# Altium PCB ball_dropper_rev2.PcbDoc (part 2 of 2)
Units mil, origin at the board's own origin, x right, y up, seen from the top; angles counter-clockwise.
Board outline 6000 x 4000 mil, 2 copper layers (Top Layer, Bottom Layer); 94 components, 89 nets, 479 pads, 374 vias.
Unrouted connection lines stored in the file: 4.
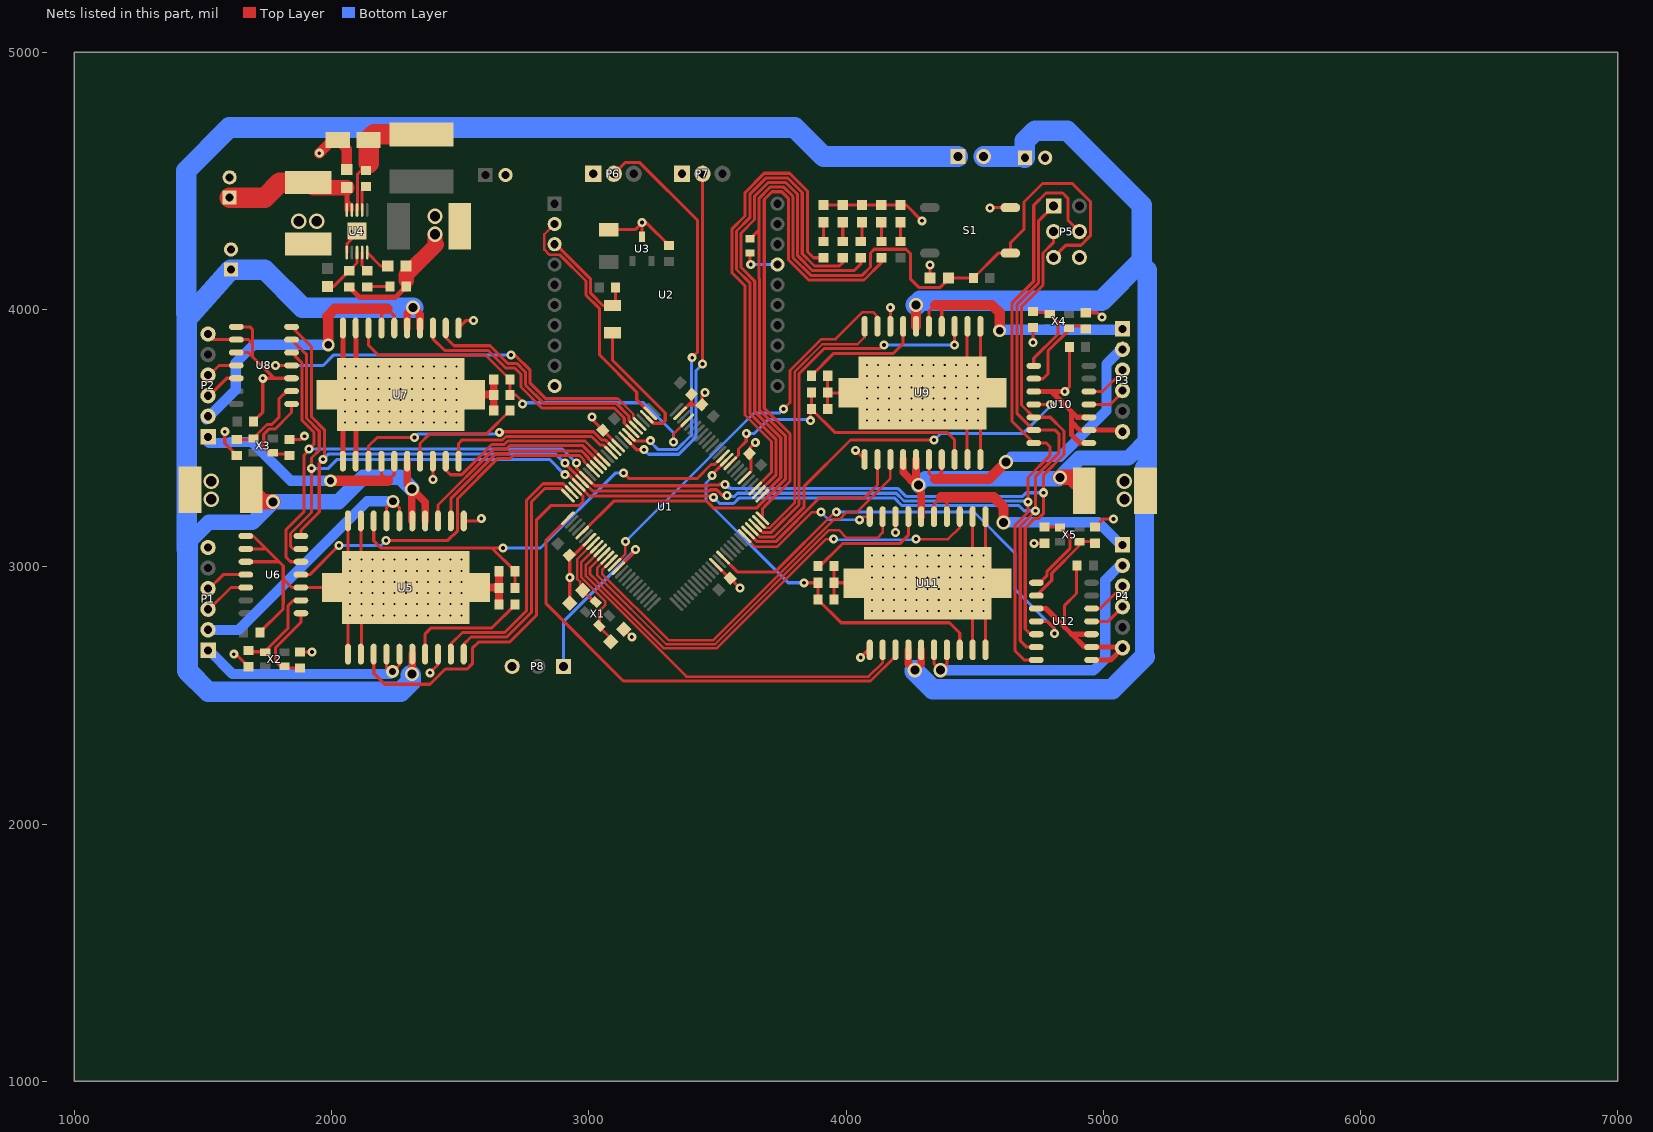
[diagram p2: the nets of this part, all layers, seen from the top]

## Via types
v1: diameter 19.68, hole 7.87, Top Layer to Bottom Layer, 266 vias
v2: diameter 35, hole 15, Top Layer to Bottom Layer, 70 vias
v3: diameter 55, hole 35, Top Layer to Bottom Layer, 13 vias
v4: diameter 60, hole 40, Top Layer to Bottom Layer, 8 vias
v5: diameter 35, hole 15, Top Layer to Bottom Layer, tented both sides, 7 vias
v6: diameter 50, hole 28, Top Layer to Bottom Layer, 4 vias
v7: diameter 55, hole 35, Top Layer to Bottom Layer, tented both sides, 3 vias
v8: diameter 135, hole 115, Top Layer to Bottom Layer, 2 vias
v9: diameter 50, hole 30, Top Layer to Bottom Layer, 1 vias

## Nets (pads, with @x,y where several pads share a name; then routed paths per layer and width w, separated by ;. In a path a pad name is that pad's centre, name@x,y a point inside that pad or via, vN(x,y) a via of type N, cw(c..) or ccw(c..) an arc to the next point about the centre after c; other vN are vias at no path point) (continued)
GND: C2.2 C3.1 C5.2 C6.1 C7.1 C8.1 C9.1 C10.1 C11.1 C12.1 C13.1 C14.1 C15.2 C16.1 C17.1 C18.1 C20.2 C21.1 C22.1 C25.1 C26.1 C29.1 C30.1 C32.2 C33.1 C35.2 C36.2 C37.2 C38.2 C39.2 C40.2 C41.2 C42.2 C46.1 C47.1 C48.1 C49.1 D2.1 D3.2 D4.2 D5.2 D6.2 D7.2 P1.6 P2.6 P3.6 P4.6 P5.6 P6.1 P7.1 P8.3 P9.2 P10.2 P11.2 P12.2 R3.1 R5.2 R6.1 R7.1 R8.1 R9.1 S1.4 U1.11 U1.32 U1.62 U1.81 U1.99 U2.10 U3.3 U4.6 U4.11 U5.1 U5.9 U5.10 U5.11 U5.12 U5.18 U5.21 U6.3 U6.8 U6.9 U6.10 U7.1 U7.9 U7.10 U7.11 U7.12 U7.18 U7.21 U8.3 U8.8 U8.9 U8.10 U9.1 U9.9 U9.10 U9.11 U9.12 U9.18 U9.21 U10.3 U10.8 U10.9 U10.10 U11.1 U11.9 U11.10 U11.11 U11.12 U11.18 U11.21 U12.3 U12.8 U12.9 U12.10 | length 11706.4
  Top Layer w12: P2.6@1512.27,3892.73 1522.27,3882.73 U8.9@1629.99,3882.73 1677.27,3882.73 1692.27,3867.73 ; v2(1585,3525) 1585,3480.05 1631.5,3433.56 C37.2@1631.5,3432.01 ; v2(1620,2660) 1628.5,2660 C35.2@1677.27,2611.23 ; U8.10@1629.99,3832.73 1677.27,3832.73 1692.27,3817.73 ; U8.8@1629.99,3932.73 1682.27,3932.73 1692.27,3922.73 1692.27,3867.73 ; U6.10@1666.68,3019.38 1795.62,3019.38 ; U6.9@1666.68,3069.38 1742.27,3069.38 ; U6.8@1666.68,3119.38 1695.62,3119.38 1795.62,3019.38 ; C47.1@1696.5,3565 1732.73,3601.23 v2(1732.73,3732.73) 1777.27,3732.73 ; C46.1@1721.5,2745 1812,2835.5 1812,2854.79 1812.27,2855.06 1812.27,2952.73 ; C38.2@1836.5,3495 1882.38,3495 v2(1895,3507.62) ; U8.3@1844.55,3732.73 1777.27,3732.73 ; C36.2@1877.27,2669.22 v2(1924.22,2669.22) ; U5.21@2001.56,2919.38 U6.3@1881.25,2919.38 1845.62,2919.38 1812.27,2952.73 ; U4.6@2059.59,4221.71 2059.59,4255.05 2077.31,4272.77 v1(2077.31,4304.38) ; U5.11@2063.96,2660.52 2063.96,2802.65 v1(2072.43,2811.11) v1(2115.74,2854.42) 2180.7,2919.38 v1(2159.04,2941.04) v1(2072.43,3027.65) 2063.96,3036.11 U5.10@2063.96,3178.24 ; U5.12@2113.96,2660.52 2115.74,2662.3 v1(2115.74,2811.11) 2224,2919.38 v1(2202.35,2941.04) v1(2159.04,2984.34) v1(2115.74,3027.65) 2113.96,3029.42 U5.9@2113.96,3178.24 ; v2(2382.27,2587.73) 2413.96,2619.42 U5.18@2413.96,2660.52 ; v2(2393.96,3339.42) U7.18@2393.96,3410.52 ; U7.1@2493.96,3928.24 2523.45,3957.73 v2(2552.27,3957.73) ; U5.1@2513.96,3178.24 2572.78,3178.24 v2(2582.27,3187.73) ; C10.1@2926.15,2857.67 2926.22,3028.74 2967.27,3069.76 U1.32@3002.88,3105.37 ; v2(3012.27,3582.73) 3012.27,3573.41 U1.11@3114.23,3471.45 ; C8.1@3077.27,4310.72 3180.26,4310.72 v2(3207.27,4337.73) ; C11.1@3136.26,2757.78 v2(3167.27,2726.77) ; U3.3@3207.27,4282.97 v2(3207.27,4337.73) ; C7.1@3312.27,4249.22 3223.77,4337.73 v2(3207.27,4337.73) ; U1.99@3355.04,3596.72 3388.31,3630 ; C14.1@3399.54,3670.46 3399.54,3641.23 3388.31,3630 ; v2(3452.27,3677.73) 3440,3665.46 C16.1@3440,3630 3388.31,3630 ; U1.62@3494.23,3007.93 C15.2@3547.16,2955 ; C15.2@3549.54,2955 3586.81,2917.73 v2(3587.27,2917.73) ; U1.81@3605.59,3346.17 3630.45,3371.04 3630.45,3434.55 C17.1@3625,3440 3625,3460.46 v2(3647.27,3482.73) ; D4.2@3912.27,4406.19 D5.2@3987.27,4406.19 D6.2@4062.27,4406.19 D7.2@4137.27,4406.19 D3.2@4212.27,4406.19 4233.81,4406.19 v2(4295,4345) ; C26.1@3928.85,3612.73 R8.1@3928.85,3677.73 C29.1@3928.85,3742.73 ; R8.1@3930.5,3676.08 U9.21@4009.87,3676.08 ; C30.1@3953.77,2872.73 R9.1@3953.77,2937.73 ; C33.1@3953.77,3002.73 R9.1@3953.77,2937.73 ; U11.21@4028.22,2937.73 R9.1@3953.77,2937.73 ; v2(4036.76,3452.73) U9.1@4072.27,3417.22 ; v2(4057.27,2647.73) 4086.76,2677.22 U11.1@4092.27,2677.22 ; U9.18@4172.27,3934.93 v2(4172.27,4007.73) ; v2(4192.27,3132.73) U11.18@4192.27,3194.93 ; v2(4326.92,4173.08) C9.1@4326.92,4122.73 C9.1@4332.27,4122.73 ; U9.21@4405.54,3784.34 v1(4427.19,3784.34) v1(4470.5,3784.34) ; v1(4470.5,3567.81) 4470.5,3418.99 U9.9@4472.27,3417.22 ; U9.12@4472.27,3934.93 4470.5,3933.16 v1(4470.5,3784.34) ; v1(4490.5,2827.81) 4492.27,2826.04 U11.9@4492.27,2677.22 ; v1(4490.5,3044.34) 4492.27,3046.11 U11.12@4492.27,3194.93 ; v1(4513.81,3567.81) 4522.27,3559.34 U9.10@4522.27,3417.22 ; U9.11@4522.27,3934.93 U9.11@4522.27,3934.93 4522.35,3792.89 v1(4513.81,3784.34) v1(4470.5,3784.34) ; v1(4533.81,2827.81) 4542.27,2819.34 U11.10@4542.27,2677.22 ; v1(4533.81,3044.34) 4542.27,3052.81 U11.11@4542.27,3194.93 ; v2(4560,4395) 4561.31,4396.31 S1.4@4638.85,4396.31 ; C40.2@4716.48,3933.52 C40.2@4727.27,3933.52 ; v2(4727.27,3872.27) C40.2@4727.27,3929.58 ; v2(4731.23,3091.23) C42.2@4772.35,3091.23 ; C42.2@4759.91,3095.17 C42.2@4772.35,3095.17 ; 4850.04,2765.04 4850.04,2850.04 4896.09,2896.09 4896.09,3002.59 C49.1@4898.5,3005 ; v2(4850.62,3681.08) 4868.5,3698.96 C48.1@4868.5,3855 ; C39.2@4932.27,3987.57 4977.43,3987.57 v2(4995,3970) ; U10.10@4938.74,3586.89 U10.10@4944.55,3581.08 ; C41.2@4967.35,3154.22 4998.12,3185 v2(5040,3185) ; P4.6@5065.62,2687.73 P4.6@5072.27,2681.08 ; P3.6@5067.27,3531.08 P3.6@5077.27,3521.08 ; 1692.27,3817.73 1777.27,3732.73 ; 1692.27,3817.73 1692.27,3867.73 ; 1795.62,3019.38 1812.27,3002.73 1812.27,2952.73
  Top Layer w20: U7.11@2043.96,3410.52 2043.96,3552.65 v1(2052.43,3561.11) ; U7.10@2043.96,3928.24 2043.96,3786.11 v1(2052.43,3777.65) v1(2139.04,3691.04) U7.21@2160.7,3669.38 ; R3.1@2068.96,4087.89 2109.12,4047.73 2248.81,4047.73 C6.1@2290.46,4089.38 ; U7.12@2093.96,3410.52 2095.74,3412.3 v1(2095.74,3561.11) 2204,3669.38 v1(2182.35,3691.04) v1(2139.04,3734.34) v1(2095.74,3777.65) 2095.74,3926.47 U7.9@2093.96,3928.24 ; U10.3@4729.99,3681.08 4798.92,3681.08 ; U12.3@4740.07,2837.73 4777.35,2837.73 4850.04,2765.04 4877.35,2737.73 ; v2(4850.62,3681.08) 4798.92,3681.08 ; U10.8@4944.55,3481.08 4908.92,3481.08 4877.27,3512.73 4877.27,3562.73 ; U10.10@4944.55,3581.08 4898.92,3581.08 4877.27,3602.73 ; U12.8@4954.63,2637.73 5028.92,2637.73 P4.6@5072.27,2681.08 ; U12.10@4954.63,2737.73 4877.35,2737.73 ; P4.6@5065.62,2687.73 U12.9@4954.63,2687.73 4927.35,2687.73 4877.35,2737.73 ; P3.6@5067.27,3531.08 U10.9@4944.55,3531.08 4908.92,3531.08 4877.27,3562.73 ; 4798.92,3681.08 4877.27,3602.73 ; 4877.27,3562.73 4877.27,3602.73
  Top Layer w30: U7.21@2556.37,3669.38 2629.12,3669.38 2630.78,3671.04 C22.1@2630.78,3727.73 ; U5.21@2576.37,2919.38 2649.12,2919.38 2650.78,2921.04 C18.1@2650.78,2982.73 ; C25.1@2630.78,3607.73 R7.1@2630.78,3667.73 ; C21.1@2650.78,2852.73 R6.1@2650.78,2917.73
  Top Layer w40: v2(1952.27,4607.73) 2003.92,4659.38 D2.1@2023.92,4659.38 2058.96,4624.34 C3.1@2058.96,4544.82 ; C6.1@2290.46,4089.38 2290.46,4112.73
  Top Layer w60: 2290.46,4112.73 2290.46,4135.92 2407.27,4252.73 2402.27,4257.73 v4(2402.27,4292.73)
  Bottom Layer w12: v2@4167.27,4012.73 v2(4172.27,4007.73)
  other v1: 2159.04,2811.11 2202.35,2811.11 2245.66,2811.11 2288.96,2811.11 2332.27,2811.11 2375.58,2811.11 2418.89,2811.11 2462.19,2811.11 2505.5,2811.11 4100.74,2827.81 4144.04,2827.81 4187.35,2827.81 4230.66,2827.81 4273.96,2827.81 4317.27,2827.81 4360.58,2827.81 4403.89,2827.81 4447.19,2827.81 2072.43,2854.42 2159.04,2854.42 2202.35,2854.42 2245.66,2854.42 2288.96,2854.42 2332.27,2854.42 2375.58,2854.42 2418.89,2854.42 2462.19,2854.42 2505.5,2854.42 4100.74,2871.11 4144.04,2871.11 4187.35,2871.11 4230.66,2871.11 4273.96,2871.11 4317.27,2871.11 4360.58,2871.11 4403.89,2871.11 4447.19,2871.11 4490.5,2871.11 4533.81,2871.11 2072.43,2897.73 2115.74,2897.73 2159.04,2897.73 2202.35,2897.73 2245.66,2897.73 2288.96,2897.73 2332.27,2897.73 2375.58,2897.73 2418.89,2897.73 2462.19,2897.73 2505.5,2897.73 4100.74,2914.42 4144.04,2914.42 4187.35,2914.42 4230.66,2914.42 4273.96,2914.42 4317.27,2914.42 4360.58,2914.42 4403.89,2914.42 4447.19,2914.42 4490.5,2914.42 4533.81,2914.42 2072.43,2941.04 2115.74,2941.04 2245.66,2941.04 2288.96,2941.04 2332.27,2941.04 2375.58,2941.04 2418.89,2941.04 2462.19,2941.04 2505.5,2941.04 4100.74,2957.73 4144.04,2957.73 4187.35,2957.73 4230.66,2957.73 4273.96,2957.73 4317.27,2957.73 4360.58,2957.73 4403.89,2957.73 4447.19,2957.73 4490.5,2957.73 4533.81,2957.73 2072.43,2984.34 2115.74,2984.34 2202.35,2984.34 2245.66,2984.34 2288.96,2984.34 2332.27,2984.34 2375.58,2984.34 2418.89,2984.34 2462.19,2984.34 2505.5,2984.34 4100.74,3001.04 4144.04,3001.04 4187.35,3001.04 4230.66,3001.04 4273.96,3001.04 4317.27,3001.04 4360.58,3001.04 4403.89,3001.04 4447.19,3001.04 4490.5,3001.04 4533.81,3001.04 2159.04,3027.65 2202.35,3027.65 2245.66,3027.65 2288.96,3027.65 2332.27,3027.65 2375.58,3027.65 2418.89,3027.65 2462.19,3027.65 2505.5,3027.65 4100.74,3044.34 4144.04,3044.34 4187.35,3044.34 4230.66,3044.34 4273.96,3044.34 4317.27,3044.34 4360.58,3044.34 4403.89,3044.34 4447.19,3044.34 2139.04,3561.11 2182.35,3561.11 2225.66,3561.11 2268.96,3561.11 2312.27,3561.11 2355.58,3561.11 2398.89,3561.11 2442.19,3561.11 2485.5,3561.11 4080.74,3567.81 4124.04,3567.81 4167.35,3567.81 4210.66,3567.81 4253.96,3567.81 4297.27,3567.81 4340.58,3567.81 4383.89,3567.81 4427.19,3567.81 2052.43,3604.42 2095.74,3604.42 2139.04,3604.42 2182.35,3604.42 2225.66,3604.42 2268.96,3604.42 2312.27,3604.42 2355.58,3604.42 2398.89,3604.42 2442.19,3604.42 2485.5,3604.42 4080.74,3611.11 4124.04,3611.11 4167.35,3611.11 4210.66,3611.11 4253.96,3611.11 4297.27,3611.11 4340.58,3611.11 4383.89,3611.11 4427.19,3611.11 4470.5,3611.11 4513.81,3611.11 2052.43,3647.73 2095.74,3647.73 2139.04,3647.73 2182.35,3647.73 2225.66,3647.73 2268.96,3647.73 2312.27,3647.73 2355.58,3647.73 2398.89,3647.73 2442.19,3647.73 2485.5,3647.73 4080.74,3654.42 4124.04,3654.42 4167.35,3654.42 4210.66,3654.42 4253.96,3654.42 4297.27,3654.42 4340.58,3654.42 4383.89,3654.42 4427.19,3654.42 4470.5,3654.42 4513.81,3654.42 2052.43,3691.04 2095.74,3691.04 2225.66,3691.04 2268.96,3691.04 2312.27,3691.04 2355.58,3691.04 2398.89,3691.04 2442.19,3691.04 2485.5,3691.04 4080.74,3697.73 4124.04,3697.73 4167.35,3697.73 4210.66,3697.73 4253.96,3697.73 4297.27,3697.73 4340.58,3697.73 4383.89,3697.73 4427.19,3697.73 4470.5,3697.73 4513.81,3697.73 2052.43,3734.34 2095.74,3734.34 2182.35,3734.34 2225.66,3734.34 2268.96,3734.34 2312.27,3734.34 2355.58,3734.34 2398.89,3734.34 2442.19,3734.34 2485.5,3734.34 4080.74,3741.04 4124.04,3741.04 4167.35,3741.04 4210.66,3741.04 4253.96,3741.04 4297.27,3741.04 4340.58,3741.04 4383.89,3741.04 4427.19,3741.04 4470.5,3741.04 4513.81,3741.04 2139.04,3777.65 2182.35,3777.65 2225.66,3777.65 2268.96,3777.65 2312.27,3777.65 2355.58,3777.65 2398.89,3777.65 2442.19,3777.65 2485.5,3777.65 4080.74,3784.34 4124.04,3784.34 4167.35,3784.34 4210.66,3784.34 4253.96,3784.34 4297.27,3784.34 4340.58,3784.34 4383.89,3784.34 2120.62,4304.38
  other v2: 2926.19,2957.73
  other v4: 1532.27,3262.73 5082.27,3262.73 1532.27,3332.73 5082.27,3332.73 1872.27,4342.73 1942.27,4342.73 2402.27,4362.73
MISO: P5.1 U1.22 U6.6 U8.6 U10.6 U12.6 | length 5900.2
  Top Layer w12: U8.6@1844.55,3882.73 1870.74,3856.54 1871.15,3856.54 1885.1,3842.59 1885.1,3842.19 1903.1,3824.19 1903.1,3576.45 1952.27,3527.27 1952.27,3452.73 1922.27,3422.73 v2(1922.27,3382.73) 1922.27,3210.81 1840.7,3129.25 1840.7,3079.3 1850.62,3069.38 U6.6@1881.25,3069.38 ; v2(2907.27,3357.73) 2921.72,3357.73 U1.22@2961.12,3318.33 2961.12,3315.95 3002.07,3275 3480,3275 v2(3485,3270) v2@3485,3280.46 ; U10.6@4729.58,3531.08 4664,3596.66 4664,4018.54 4747.82,4102.37 4747.82,4343.2 P5.1@4807.35,4402.73 ; U10.6@4729.99,3531.08 4814,3531.08 4827.35,3517.73 4827.35,3441.72 4737.27,3351.65 v2(4737.27,3217.73) 4727.73,3217.73 4725.27,3215.27 4725.27,3204.82 4677.35,3156.89 4677.35,2712.73 4702.35,2687.73 U12.6@4740.07,2687.73
  Bottom Layer w12: v2(1922.27,3382.73) 1987.27,3382.73 2022.27,3417.73 2847.27,3417.73 v2(2907.27,3357.73) ; v2(3485,3270) v2@3485,3273.74 ; v2@3492.27,3281.01 3492.27,3262.73 3509.27,3245.73 3563.36,3245.73 3585.36,3267.73 4187.9,3267.73 4217.9,3237.73 4672.27,3237.73 4692.27,3217.73 v2(4737.27,3217.73)
MOSI: P5.4 U1.21 U6.7 U8.7 U10.7 U12.7 | length 6062.8
  Top Layer w12: U8.7@1844.55,3932.73 1870.74,3906.54 1871.15,3906.54 1885.1,3892.59 1885.1,3892.19 1922.27,3855.01 1922.27,3582.73 1972.27,3532.73 1972.27,3422.73 v2(1967.27,3417.73) 1952.27,3402.73 1952.27,3212.73 1881.25,3141.71 U6.7@1881.25,3119.38 ; v2(2907.27,3402.73) 2907.27,3402.4 3014.67,3295 3468.28,3295 3472.78,3299.5 3497.22,3299.5 3518.99,3277.73 v2(3537.27,3277.73) ; U12.7@4740.07,2637.73 4692.35,2637.73 4657.35,2672.73 4657.35,3162.35 4707.27,3212.27 v2(4707.27,3252.73) 4707.27,3347.1 4792.35,3432.18 4792.35,3467.73 4779,3481.08 U10.7@4729.99,3481.08 4729.58,3481.08 4646,3564.66 4646,4026 4729.82,4109.82 4729.82,4405.2 4777.35,4452.73 4842.35,4452.73 4862.35,4432.73 4862.35,4347.73 P5.4@4907.35,4302.73
  Bottom Layer w12: v2(1967.27,3417.73) 1987.27,3437.73 2872.27,3437.73 v2(2907.27,3402.73) ; v2(3537.27,3277.73) 3542.27,3277.73 3547.27,3272.73 3564.9,3272.73 3577.9,3285.73 4195.35,3285.73 4225.35,3255.73 4704.27,3255.73 v2(4707.27,3252.73)
MOT1_A: U1.16 U5.3 | length 817.4
  Top Layer w12: U5.3@2413.96,3178.24 2413.96,3240.33 2630.86,3457.23 2679.4,3457.23 2692.9,3470.73 2976.9,3470.73 3044.63,3403 U1.16@3044.63,3401.85
MOT1_B: U1.24 U5.19 | length 1031.4
  Top Layer w12: U5.19@2463.96,2660.52 2463.96,2699.42 2509.27,2744.73 2673.82,2744.73 2757.27,2828.18 2757.27,3257.73 2822.27,3322.73 2900.55,3322.73 2932.79,3290.49 U1.24@2933.28,3290.49
MOT1_EN: U1.25 U5.20 | length 957.7
  Top Layer w12: U5.20@2513.96,2660.52 2513.96,2698.32 2542.37,2726.73 2681.27,2726.73 2777.27,2822.73 2777.27,3252.27 2829.73,3304.73 2891.2,3304.73 U1.25@2919.36,3276.57
MOT1_ENCA: P1.3 U6.12 | length 177.9
  Top Layer w12: P1.3@1523.96,2834.38 1608.96,2919.38 U6.12@1666.68,2919.38
MOT1_ENCB: P1.4 U6.11 | length 165.5
  Top Layer w12: P1.4@1523.96,2914.38 1578.96,2969.38 U6.11@1666.68,2969.38
MOT1_FB: C18.2 R6.2 U1.87 U5.8 | length 1816.3
  Top Layer w12: U5.8@2163.96,3178.24 2163.96,3101.04 2191.89,3073.11 2623.38,3073.11 ; v5(2666.89,3073.11) 2623.38,3073.11 ; R6.2@2713.77,2917.73 C18.2@2713.77,2982.73 2623.38,3073.11 ; v2@3124.54,3365 v2(3135,3365) 3157.27,3342.73 3420.55,3342.73 3475.05,3397.23 3489.61,3397.23 U1.87@3522.07,3429.69
  Bottom Layer w12: v5(2666.89,3073.11) 2812.66,3073.11 3104.54,3365 v2(3135,3365)
MOT1_FS: U1.17 U5.2 | length 758.4
  Top Layer w12: U5.2@2463.96,3178.24 2463.96,3264.88 2638.32,3439.23 2686.86,3439.23 2698.36,3450.73 2971.45,3450.73 2999.77,3422.4 2999.77,3418.87 U1.17@3030.71,3387.93
MOT1_OUT1: P1.1 U5.14 U5.15 | length 927.6
  Top Layer w12: U5.14@2213.96,2660.52 2213.96,2606.04 2227.27,2592.73 v6(2237.27,2592.73) ; v6@2237.27,2582.73 2237.27,2591.72 2263.96,2618.42 U5.15@2263.96,2660.52
  Bottom Layer w40: P1.1@1523.96,2674.38 1615.62,2582.73 2227.27,2582.73 v6(2237.27,2592.73)
MOT1_OUT2: P1.2 U5.6 U5.7 | length 1095.2
  Top Layer w12: U5.7@2213.96,3178.24 2213.96,3229.38 v9(2238.96,3254.38) 2263.96,3229.38 U5.6@2263.96,3178.24
  Bottom Layer w40: P1.2@1523.96,2754.38 1638.92,2754.38 1985.06,3100.52 1985.06,3100.75 2138.7,3254.38 v9(2238.96,3254.38)
MOT1_SS: U1.18 U6.4 | length 1428.5
  Top Layer w12: U6.4@1881.25,2969.38 1915.22,2969.38 v2(2028.56,3082.73) ; v2(2212.27,3102.73) 2452.27,3102.73 2490.15,3140.61 2490.15,3265.61 2645.77,3421.23 2694.31,3421.23 2695.81,3422.73 2697.27,3422.73 2707.27,3432.73 2952.27,3432.73 2952.77,3432.23 2964.49,3432.23 2981.77,3414.95 2981.77,3409.03 U1.18@3016.79,3374.01
  Bottom Layer w12: v2(2028.56,3082.73) 2192.27,3082.73 v2(2212.27,3102.73)
MOT1_TRI_EN: U1.23 U5.13 | length 1515.6
  Top Layer w12: U5.13@2163.96,2660.52 2163.96,2586.04 2206.77,2543.23 2382.77,2543.23 2442.27,2602.73 2527.27,2602.73 2547.27,2622.73 2547.27,2682.73 2572.27,2707.73 2692.27,2707.73 2797.27,2812.73 2797.27,3182.73 2852.27,3237.73 2962.27,3237.73 2977.43,3252.89 2977.43,3274.18 U1.23@2947.2,3304.41
MOT2_A: U1.7 U7.3 | length 1007.5
  Top Layer w12: U7.3@2393.96,3928.24 2393.96,3886.04 2438.89,3841.11 2608.43,3841.11 2676.82,3772.73 2712.27,3772.73 2736.27,3748.73 2736.27,3698.73 2817.77,3617.23 3099.34,3617.23 3137.99,3578.58 3137.99,3559.04 U1.7@3169.91,3527.12
MOT2_B: U1.15 U7.19 | length 741.1
  Top Layer w12: U7.19@2443.96,3410.52 2443.96,3376.04 2462.27,3357.73 2505.9,3357.73 2623.4,3475.23 2671.95,3475.23 2685.45,3488.73 2985.59,3488.73 U1.15@3058.55,3415.77
MOT2_EN: U1.13 U7.20 | length 698.8
  Top Layer w12: U7.20@2493.96,3410.52 2493.96,3479.42 2507.77,3493.23 2664.49,3493.23 2677.99,3506.73 3011.25,3506.73 3043.97,3474.01 3055.99,3474.01 U1.13@3086.39,3443.61
MOT2_ENCA: P2.3 U8.12 | length 136.7
  Top Layer w12: P2.3@1522.27,3662.73 1592.27,3732.73 U8.12@1629.99,3732.73
MOT2_ENCB: P2.4 U8.11 | length 124.3
  Top Layer w12: P2.4@1522.27,3742.73 1562.27,3782.73 U8.11@1629.99,3782.73
MOT2_FB: C22.2 R7.2 U1.97 U7.8 | length 1580.4
  Top Layer w10: v2(3330,3485) 3330,3516.01 U1.97@3382.88,3568.88
  Top Layer w12: U7.8@2143.96,3928.24 2143.96,3861.04 2181.89,3823.11 2598.38,3823.11 C22.2@2693.77,3727.73 R7.2@2693.77,3667.73 2717.27,3667.73 2742.27,3642.73 v5(2742.27,3632.73)
  Bottom Layer w12: v5(2742.27,3632.73) 2747.27,3637.73 3212.27,3637.73 3330,3520 v2(3330,3485)
MOT2_FS: U1.6 U7.2 | length 961.4
  Top Layer w12: U7.2@2443.96,3928.24 2443.96,3891.04 2475.89,3859.11 2615.89,3859.11 2684.27,3790.73 2719.73,3790.73 2754.27,3756.18 2754.27,3706.18 2825.23,3635.23 3106.79,3635.23 3155.99,3586.03 3155.99,3568.88 U1.6@3183.83,3541.04
MOT2_OUT1: P2.1 U7.14 U7.15 | length 948.2
  Top Layer w12: U7.14@2193.96,3410.52 2193.96,3359.38 2218.96,3334.38 2243.96,3359.38 U7.15@2243.96,3410.52
  Top Layer w40: v6(1995.62,3334.38) 2218.96,3334.38
  Bottom Layer w40: P2.1@1512.27,3492.73 1523.5,3481.5 1603.02,3481.5 1606.52,3485 1690.66,3485 1841.28,3334.38 v6(1995.62,3334.38)
MOT2_OUT2: P2.2 U7.6 U7.7 | length 1185.8
  Top Layer w12: U7.7@2193.96,3928.24 2193.96,3979.42 2217.27,4002.73 2243.96,3976.04 U7.6@2243.96,3928.24
  Top Layer w40: v6(1987.27,3862.73) 1987.27,3967.73 1982.27,3972.73 2012.27,4002.73 2217.27,4002.73
  Bottom Layer w40: P2.2@1512.27,3572.73 1627.27,3687.73 1627.27,3792.73 1697.27,3862.73 v6(1987.27,3862.73)
MOT2_SS: U1.5 U8.4 | length 1642.4
  Top Layer w10: 3107.27,3653.23 3112.84,3653.23 3172.99,3593.08 3172.99,3579.72 U1.5@3197.75,3554.96
  Top Layer w12: v2(1782.27,3782.73) U8.4@1844.55,3782.73 ; v5(2697.27,3822.73) 2713.18,3822.73 2772.27,3763.64 2772.27,3713.64 2832.68,3653.23 3107.27,3653.23
  Bottom Layer w12: v2(1782.27,3782.73) 1967.27,3782.73 2007.27,3822.73 v5(2697.27,3822.73)
MOT2_TRI_EN: U1.12 U7.13 | length 1066
  Top Layer w12: U7.13@2143.96,3410.52 2143.96,3469.42 2177.27,3502.73 v2(2322.27,3502.73) ; v5(2652.27,3522.73) 2654.27,3524.73 3018.7,3524.73 3051.42,3492.01 3065.83,3492.01 U1.12@3100.31,3457.53
  Bottom Layer w12: v2(2322.27,3502.73) 2335.19,3515.65 2645.19,3515.65 v5(2652.27,3522.73)
MOT3_A: U1.38 U9.3 | length 1624.7
  Top Layer w10: U1.38@3086.39,3021.85 3052.27,2987.73 3052.27,2972.73 3310.27,2714.73 3484.02,2714.73 3953.52,3184.23 3974.08,3184.23 4002.58,3212.73 4042.27,3212.73 4172.27,3342.73 U9.3@4172.27,3417.22
MOT3_B: U1.39 U9.19 | length 1574.7
  Top Layer w10: U1.39@3100.31,3007.93 3142.27,3049.89 v2(3142.27,3097.73) ; v2(3757.27,3612.73) 3782.27,3637.73 3782.27,3762.27 3905,3885 3960,3885 4065,3990 4105,3990 4122.27,3972.73 U9.19@4122.27,3934.93
  Bottom Layer w10: v2(3142.27,3097.73) 3642.27,3597.73 3742.27,3597.73 v2(3757.27,3612.73)
MOT3_EN: U1.74 U9.20 | length 1068.9
  Top Layer w10: U1.74@3661.26,3174.96 3685.13,3151.1 3703.07,3151.1 3800.27,3248.3 3800.27,3757.64 3907.63,3865 4045,3865 4072.27,3892.27 U9.20@4072.27,3934.93
MOT3_ENCA: P3.3 U10.12 | length 165.9
  Top Layer w12: U10.12@4944.55,3681.08 4997.27,3681.08 P3.3@5077.27,3761.08
MOT3_ENCB: P3.4 U10.11 | length 153.4
  Top Layer w12: U10.11@4944.55,3631.08 5027.27,3631.08 P3.4@5077.27,3681.08
MOT3_FB: C26.2 R8.2 U1.85 U9.8 | length 1209.7
  Top Layer w12: U1.85@3549.91,3401.85 3582.27,3434.21 3582.27,3457.73 3612.27,3487.73 v2(3612.27,3517.73) ; v5(3862.27,3567.73) 3862.27,3609.15 C26.2@3865.85,3612.73 ; R8.2@3865.85,3677.73 C26.2@3865.85,3612.73 ; U9.8@4422.27,3417.22 4422.27,3492.81 4392.74,3522.34 3956.24,3522.34 C26.2@3865.85,3612.73
  Bottom Layer w12: v2(3612.27,3517.73) 3642.27,3517.73 3697.27,3572.73 3857.27,3572.73 v5(3862.27,3567.73)
MOT3_FS: U1.71 U9.2 | length 708.1
  Top Layer w12: U1.71@3619.51,3133.2 3654.98,3097.73 3727.27,3097.73 3897.27,3267.73 4072.27,3267.73 4122.27,3317.73 U9.2@4122.27,3417.22
MOT3_OUT1: P3.1 U9.14 U9.15 | length 999.7
  Top Layer w12: U9.15@4322.27,3934.93 4322.27,3992.65 4347.35,4017.73 ; 4352.35,4012.73 4372.27,3992.81 U9.14@4372.27,3934.93
  Top Layer w40: 4347.35,4017.73 4567.35,4017.73 4597.35,3987.73 v6(4597.35,3917.73)
  Bottom Layer w40: v6(4597.35,3917.73) 4594,3921.08 P3.1@5077.27,3921.08
MOT3_OUT2: P3.2 U9.6 U9.7 | length 1217.6
  Top Layer w12: U9.6@4322.27,3417.22 4322.27,3364.34 4345.58,3341.04 4372.27,3367.73 U9.7@4372.27,3417.22
  Top Layer w40: 4345.58,3341.04 4555.66,3341.04 v3(4622.35,3407.73)
  Bottom Layer w40: v3(4622.35,3407.73) 4642.35,3427.73 4833.15,3427.73 5012.35,3606.92 5012.35,3787.35 5066.08,3841.08 P3.2@5077.27,3841.08
MOT3_SS: U1.72 U10.4 | length 1502.6
  Top Layer w12: U1.72@3633.43,3147.12 3664.82,3115.73 3719.82,3115.73 3837.27,3233.18 3837.27,3312.73 4017.27,3492.73 v2(4342.27,3492.73) v2@4342.27,3487.73 ; U10.4@4729.99,3631.08 v2(4795.62,3631.08)
  Bottom Layer w12: v2(4342.27,3492.73) 4367.27,3517.73 4687.27,3517.73 v2@4794.77,3625.23
MOT3_TRI_EN: U1.73 U9.13 | length 1458.9
  Top Layer w12: U1.73@3647.34,3161.04 3674.66,3133.73 3709.74,3133.73 3817.27,3241.26 3817.27,3750.6 3914.48,3847.81 4132.35,3847.81 v2(4147.27,3862.73) ; v2(4422.27,3862.65) U9.13@4422.27,3934.93
  Bottom Layer w12: v2(4147.27,3862.73) v2(4147.27,3862.73) v2(4422.27,3862.65)
MOT4_A: U1.26 U11.3 | length 1915.3
  Top Layer w12: U1.26@2919.36,3188.88 2834.27,3103.8 2834.27,2855.73 3134.27,2555.73 4095.27,2555.73 4192.27,2652.73 U11.3@4192.27,2677.22
MOT4_B: U1.37 U11.19 | length 1572.9
  Top Layer w10: U1.37@3072.47,3035.77 3032.27,2995.57 3032.27,2967.73 3301.27,2698.73 3490.64,2698.73 3934.64,3142.73 3972.27,3142.73 4002.27,3112.73 4122.27,3112.73 4142.27,3132.73 U11.19@4142.27,3194.93
MOT4_EN: U1.70 U11.20 | length 577.3
  Top Layer w10: U1.70@3605.59,3119.29 3647.14,3077.73 3732.27,3077.73 3867.27,3212.73 v2(3902.27,3212.73) ; v2(4052.27,3182.73) 4064.48,3194.93 U11.20@4092.27,3194.93
  Bottom Layer w10: v2(3902.27,3212.73) 3932.27,3182.73 v2(4052.27,3182.73)
MOT4_ENCA: P4.3 U12.12 | length 152.2
  Top Layer w12: U12.12@4954.63,2837.73 4988.92,2837.73 P4.3@5072.27,2921.08
MOT4_ENCB: P4.4 U12.11 | length 139.7
  Top Layer w12: U12.11@4954.63,2787.73 5018.92,2787.73 P4.4@5072.27,2841.08
MOT4_FB: C30.2 R9.2 U1.86 U11.8 | length 1502.1
  Top Layer w12: v2(3480,3355) 3480,3359.78 U1.86@3535.99,3415.77 ; v5(3837.27,2937.73) R9.2@3890.78,2937.73 C30.2@3890.78,2872.73 3981.16,2782.34 4402.66,2782.34 4442.27,2742.73 U11.8@4442.27,2677.22
  Bottom Layer w12: v2(3480,3355) 3485,3355 3455.5,3325.5 3455.5,3257.78 3775.55,2937.73 v5(3837.27,2937.73)
MOT4_FS: U1.35 U11.2 | length 1511.4
  Top Layer w10: U1.35@3044.63,3063.61 2988.75,3007.73 2988.75,2964.1 3033.88,2918.97 3033.88,2918.49 3379.64,2572.73 4088.23,2572.73 4142.27,2626.77 U11.2@4142.27,2677.22
MOT4_OUT1: P4.1 U11.14 U11.15 | length 988.4
  Top Layer w12: U11.15@4342.27,3194.93 4342.27,3242.73 4370.58,3271.04 4392.27,3249.34 U11.14@4392.27,3194.93
  Top Layer w40: 4370.58,3271.04 4574.04,3271.04 4612.35,3232.73 v3(4612.35,3172.73)
  Bottom Layer w40: v3(4612.35,3172.73) 4980.62,3172.73 P4.1@5072.27,3081.08
MOT4_OUT2: P4.2 U11.6 U11.7 | length 1230.1
  Top Layer w12: U11.6@4342.27,2677.22 4342.27,2622.81 v3(4367.35,2597.73) 4392.27,2622.65 U11.7@4392.27,2677.22
  Bottom Layer w40: v3(4367.35,2597.73) 4962.35,2597.73 5007.35,2642.73 5007.35,2947.35 5061.08,3001.08 P4.2@5072.27,3001.08
MOT4_SS: U1.64 U12.4 | length 1798.2
  Top Layer w12: U1.64@3522.07,3035.77 3577.61,2980.23 3724.77,2980.23 3957.27,3212.73 v2(3962.27,3212.73) ; U12.4@4740.07,2787.73 4782.27,2787.73 4810,2760 v2(4810,2740)
  Bottom Layer w12: v2(3962.27,3212.73) 4497.27,3212.73 4657.27,3052.73 4657.27,2912.73 4810,2760 v2(4810,2740)
MOT4_TRI_EN: U1.36 U11.13 | length 1898.1
  Top Layer w10: U1.36@3058.55,3049.69 3004.77,2995.91 3004.77,2971.48 3012.27,2963.98 3012.27,2963.21 3049.88,2925.6 3049.88,2925.12 3292.27,2682.73 3497.27,2682.73 3922.27,3107.73 v5(3952.27,3107.73) ; v2(4272.27,3107.73) 4397.27,3107.73 4442.27,3152.73 U11.13@4442.27,3194.93
  Bottom Layer w10: v5(3952.27,3107.73) 3955.77,3104.23 4268.77,3104.23 v2(4272.27,3107.73)
NetC4_1: C4.1 U4.2 | length 97.2
  Top Layer w12: U4.2@2118.65,4387.06 2118.65,4448.78 2118.96,4449.1 2118.96,4462.89 C4.1@2133.96,4477.89
NetC4_2: C4.2 D2.2 L1.2 U4.3 | length 504.8
  Top Layer w12: U4.3@2098.96,4387.06 2100.65,4388.74 2100.65,4456.24 2100.96,4456.55 2100.96,4526.42 2144,4569.46
  Top Layer w80: 2144,4569.46 D2.2@2144,4659.38 2165.34,4680.72 L1.2@2348.96,4680.72
NetC6_2: C6.2 R2.1 | length 87
  Top Layer w12: R2.1@2140.46,4089.38 C6.2@2227.47,4089.38
NetC10_2: C10.2 U1.33 X1.1 | length 305.7
  Top Layer w10: C10.2@2964.78,2919.26 C10.2@2976.26,2907.78 ; C10.2@2977.22,2907.78 2967.45,2917.55 2967.45,2940.15 2955.27,2952.32 2955.27,3029.92 U1.33@3016.79,3091.45
  Top Layer w12: C10.2@2976.26,2907.78 2977.22,2907.78 X1.1@3026.92,2858.08
NetC11_2: C11.2 U1.34 X1.2 | length 460.5
  Top Layer w10: U1.34@3030.71,3077.53 2971.27,3018.08 2971.27,2958.95 3017.88,2912.34 3017.88,2911.86 3063.27,2866.47 3063.27,2849.63
  Top Layer w12: 3063.27,2849.63 3041.06,2827.42 3041.06,2766.16 3086.15,2721.07 C11.2@3086.15,2707.67
NetC21_2: C21.2 U5.17 | length 475.6
  Top Layer w12: U5.17@2363.96,2660.52 2363.96,2739.42 2387.27,2762.73 2623.77,2762.73 C21.2@2713.77,2852.73
NetC25_2: C25.2 U7.17 | length 471.8
  Top Layer w12: U7.17@2343.96,3410.52 2343.96,3479.42 2380.19,3515.65 2601.69,3515.65 C25.2@2693.77,3607.73
NetC29_2: C29.2 U9.17 | length 475.4
  Top Layer w12: C29.2@3865.85,3742.73 3952.93,3829.81 4184.43,3829.81 4222.27,3867.65 U9.17@4222.27,3934.93
NetC33_2: C33.2 U11.17 | length 485.6
  Top Layer w12: C33.2@3890.78,3002.73 3890.78,2994.11 3986.47,3089.81 4209.35,3089.81 4242.27,3122.73 U11.17@4242.27,3194.93
NetC35_1: C35.1 U6.2 X2.1 | length 334.8
  Top Layer w12: C35.1@1677.27,2674.22 1681.89,2669.6 X2.1@1742.27,2669.6 ; X2.1@1745,2675 1830,2760 1830,2847.33 1852.05,2869.38 U6.2@1881.25,2869.38
NetC36_1: C36.1 U6.1 X2.2 | length 333.6
  Top Layer w12: C36.1@1877.27,2606.23 1808.77,2606.23 1782.27,2632.73 1782.27,2685 1881.25,2783.98 U6.1@1881.25,2819.38
NetC37_1: C37.1 U8.2 X3.1 | length 335.5
  Top Layer w12: C37.1@1631.5,3495 1695,3495 1695,3498.88 1749.12,3553 1768,3553 1795,3580 1795,3652.33 1825.4,3682.73 U8.2@1844.55,3682.73
NetC38_1: C38.1 U8.1 X3.2 | length 340.8
  Top Layer w12: C38.1@1836.5,3432.01 1830,3438.5 1761.5,3438.5 1736.5,3463.5 1736.5,3514.92 1756.57,3535 1780,3535 1844.55,3599.55 U8.1@1844.55,3632.73
NetC39_1: C39.1 U10.2 X4.1 | length 348.3
  Top Layer w12: U10.2@4729.99,3731.08 4766.08,3731.08 4785,3750 4785,3839.54 4867.27,3921.82 X4.1@4867.27,3922.73 ; X4.1@4867.27,3927.73 X4.1@4867.27,3922.73 ; C39.1@4932.27,3928.52 4924.71,3936.08 4880.62,3936.08 X4.1@4867.27,3922.73
NetC40_1: C40.1 U10.1 X4.2 | length 318.7
  Top Layer w12: C40.1@4727.27,3988.63 X4.2@4792.27,3988.63 ; U10.1@4729.99,3781.08 4729.99,3809.99 4823.96,3903.96 4823.96,3951.04 X4.2@4792.27,3982.73
NetC41_1: C41.1 U12.2 X5.1 | length 337
  Top Layer w12: U12.2@4740.07,2887.73 4766.26,2913.92 4766.66,2913.92 4780.61,2927.87 4780.61,2928.27 4800,2947.66 4800,2975 4905.59,3080.59 4905.59,3096.04 X5.1@4907.27,3097.73 C41.1@4964.79,3097.73
NetC42_1: C42.1 U12.1 X5.2 | length 352.4
  Top Layer w12: U12.1@4740.07,2937.73 4752.73,2937.73 4782,2967 4782,2982.46 4870,3070.46 4870,3115 X5.2@4832.27,3152.73 4830.78,3154.22 C42.1@4772.35,3154.22
NetD1_1: D1.1 R1.1 U2.3 | length 437.2
  Top Layer w12: U2.3@2867.27,4253.91 2871.55,4253.91 3007.27,4118.18 3007.27,4063.18 3054.58,4015.88 3103.77,4015.88 R1.1@3103.77,4085.72
NetD3_1: D3.1 R24.2 | length 75
  Top Layer w12: R24.2@4212.27,4264.3 D3.1@4212.27,4339.26
NetD4_1: D4.1 R20.2 | length 75
  Top Layer w12: R20.2@3912.35,4264.23 D4.1@3912.35,4339.19
NetD5_1: D5.1 R21.2 | length 75
  Top Layer w12: R21.2@3987.27,4264.3 D5.1@3987.27,4339.26
NetD6_1: D6.1 R22.2 | length 75
  Top Layer w12: R22.2@4062.27,4264.3 D6.1@4062.27,4339.26
NetD7_1: D7.1 R23.2 | length 75
  Top Layer w12: R23.2@4137.35,4264.23 D7.1@4137.35,4339.19
NetR2_2: R2.2 U4.9 | length 79.2
  Top Layer w12: U4.9@2118.65,4221.71 2118.65,4171.19 R2.2@2138.96,4150.88
NetR3_2: R3.2 R4.1 U4.8 | length 193.9
  Top Layer w12: R4.1@1983.96,4088.95 2007.03,4088.95 R3.2@2068.96,4150.88 2098.96,4180.88 U4.8@2098.96,4221.71
NetR5_1: R5.1 U4.10 | length 101.9
  Top Layer w12: U4.10@2138.33,4221.71 2190.66,4169.38 R5.1@2218.53,4169.38
NetR20_1: R20.1 U1.78 | length 1871.1
  Top Layer w12: U1.78@3647.34,3304.41 3710.27,3367.34 3710.27,3486.9 3607.27,3589.9 3607.27,4092.73 3556.27,4143.73 3556.27,4312.64 3607.27,4363.64 3607.27,4454.55 3682.45,4529.73 3780.27,4529.73 3850,4460 3850,4225 3873.77,4201.23 R20.1@3912.35,4201.23
NetR21_1: R21.1 U1.77 | length 1964
  Top Layer w12: U1.77@3661.26,3290.49 3728.27,3357.5 3728.27,3494.36 3627.27,3595.36 3627.27,4102.73 3574.27,4155.73 3574.27,4305.18 3626.27,4357.18 3626.27,4448.1 3689.9,4511.73 3772.82,4511.73 3829.82,4454.73 3829.82,4216.55 3877.37,4169 3974,4169 3987.35,4182.35 R21.1@3987.35,4201.23
NetR22_1: R22.1 U1.76 | length 2030.2
  Top Layer w12: U1.76@3675.18,3276.57 3746.27,3347.66 3746.27,3501.82 3645.27,3602.82 3645.27,4110.18 3592.27,4163.18 3592.27,4297.73 3644.27,4349.73 3644.27,4440.64 3697.36,4493.73 3765.36,4493.73 3811.82,4447.27 3811.82,4209.1 3869.91,4151 4031,4151 4057.27,4177.27 R22.1@4057.27,4201.23
NetR23_1: R23.1 U1.75 | length 2120.5
  Top Layer w12: U1.75@3675.18,3188.88 3675.18,3225.8 3689.96,3240.57 3690.1,3240.57 3782.27,3332.75 3782.27,3516.73 3682.27,3616.73 3682.27,4427.73 3712.27,4457.73 3750.45,4457.73 3775.82,4432.36 3775.82,4194.18 3855,4115 4070,4115 4137.35,4182.35 R23.1@4137.35,4201.23
NetR26_1: R26.1 U2.17 | length 149.7
  Top Layer w12: R26.1@3627.27,4220.17 3627.27,4177.61 v2(3629.71,4175.17)
  Bottom Layer w12: v2(3629.71,4175.17) U2.17@3733.41,4175.17
PWM1: P8.1 U1.40 | length 672.9
  Top Layer w12: U1.40@3114.23,2994.01 3182.27,3062.05 v2(3182.27,3067.73)
  Bottom Layer w12: P8.1@2902.27,2612.73 2902.27,2787.73 v2(3182.27,3067.73)
RESET: C9.2 P5.5 R25.1 R26.2 S1.3 U1.30 | length 4458.7
  Top Layer w12: U1.30@2975.04,3133.2 3096.83,3255 3458.28,3255 3485.55,3227.73 3652.27,3227.73 3657.18,3232.64 3657.18,3233.25 3682.51,3258.57 3682.64,3258.57 3764.27,3340.21 3764.27,3509.27 3663.27,3610.27 3663.27,4117.64 3662.27,4118.64 3662.27,4310.29 ; R26.2@3627.27,4275.29 3662.27,4310.29 ; P5.5@4807.35,4202.73 4854.62,4250 4913.35,4250 4950,4286.65 4950,4420 4880,4490 4763.71,4490 4692,4418.29 4692,4312 4638.85,4258.85 S1.3@4638.85,4219.15 4592.27,4219.15 R25.1@4495.85,4122.73 C9.2@4397.78,4122.73 4397.78,4117.78 4365,4085 4285,4085 4250,4120 4250,4217.95 4233.45,4234.51 4109.51,4234.51 4095,4220 4095,4165.46 4062.54,4133 3862.46,4133 3793.82,4201.64 3793.82,4439.82 3757.9,4475.73 3704.82,4475.73 3662.27,4433.18 3662.27,4310.29
RX0: U1.2 U2.2 | length 946.7
  Top Layer w10: U2.2@2867.27,4332.65 2827.27,4292.65 2827.27,4232.73 2846.27,4213.73 2886.27,4213.73 2887.27,4212.73
  Top Layer w12: 2887.27,4212.73 2989.27,4110.73 2989.27,4055.73 3042.27,4002.73 3042.27,3823.04 3186.45,3678.86 3186.45,3649.78 U1.2@3239.51,3596.72
SCK: P5.3 U1.20 U6.5 U8.5 U10.5 U12.5 | length 5741.4
  Top Layer w12: U8.5@1844.55,3832.73 1870.74,3806.54 1871.15,3806.54 1885.1,3792.59 1885.1,3568.99 1932.27,3521.82 1932.27,3477.73 v2(1912.27,3457.73) ; U6.5@1881.25,3019.38 1840.62,3019.38 1822.27,3037.73 1822.27,3142.73 1892.27,3212.73 1892.27,3432.73 v2@1912.27,3452.73 ; v2(2952.27,3402.73) 2952.27,3382.86 U1.20@2988.96,3346.17 2990.21,3347.43 3022.64,3315 3462.82,3315 3465.32,3317.5 3504.68,3317.5 3505.01,3317.17 3509.15,3321.31 3540.85,3321.31 3539.54,3320 v2(3530,3320) ; U12.5@4740.07,2737.73 4717.35,2737.73 4696.73,2758.35 4696.73,3150.82 4734.14,3188.23 4749.49,3188.23 4767.27,3206.01 v2(4767.27,3287.73) 4767.27,3356.19 4847.35,3436.27 4847.35,3527.73 4794,3581.08 U10.5@4729.99,3581.08 4729.58,3581.08 4682,3628.66 4682,4011.09 4765.82,4094.91 4765.82,4219.93 4807.35,4261.46 P5.3@4807.35,4302.73
  Bottom Layer w12: v2(1912.27,3457.73) 2897.27,3457.73 v2(2952.27,3402.73) ; v2(3530,3320) 3542.77,3307.23 3549.49,3307.23 3552.99,3303.73 4202.81,3303.73 4232.81,3273.73 4686.55,3273.73 4700.55,3287.73 v2(4767.27,3287.73)
SW1: P6.2 U1.8 | length 1575.4
  Top Layer w12: P6.2@3097.27,4527.73 3140.77,4571.23 3198.78,4571.23 3422.27,4347.73 3422.27,3832.73 v2(3402.27,3812.73) ; U1.8@3155.99,3513.21 3180.85,3488.34 3238.34,3488.34 v2(3240,3490)
  Bottom Layer w12: v2(3240,3490) 3240,3485 3269.5,3455.5 3342.22,3455.5 3399.27,3512.55 3399.27,3809.73 v2(3402.27,3812.73)
SW2: P7.2 U1.9 | length 1361.8
  Top Layer w12: U1.9@3142.07,3499.29 3186.36,3455 v2(3215,3455) ; v2(3442.27,3787.73) P7.2@3442.27,4527.73
  Bottom Layer w12: v2(3215,3455) 3232.5,3437.5 3349.68,3437.5 3417.27,3505.1 3417.27,3762.73 v2(3442.27,3787.73)
TX0: D1.2 U1.3 | length 540.6
  Top Layer w12: D1.2@3092.27,3909.58 3092.27,3802.73 3297.27,3597.73 3297.27,3567.73 3287.48,3557.94 3250.45,3557.94 U1.3@3225.59,3582.8 U1.3@3245.21,3563.18
VBATT: C2.1 C3.2 C20.1 P9.1 P10.1 P13.1 U4.4 U4.5 U5.4 U5.5 U5.16 U7.4 U7.5 U7.16 | length 9417.3
  Top Layer w12: U5.5@2312.27,3179.93 U5.5@2313.96,3178.24
  Top Layer w15: 2059.59,4421.95 2079.28,4402.26 U4.4@2079.28,4387.06
  Top Layer w20: C3.2@2058.04,4473.03 2059.59,4471.48 2059.59,4421.95 U4.5@2059.59,4387.06
  Top Layer w30: U7.16@2293.96,3410.52 2293.96,3321.04 v3(2312.27,3302.73) ; U7.5@2293.96,3928.24 2293.96,3984.42 v7(2317.27,4007.73) 2343.96,3981.04 U7.4@2343.96,3928.24 ; U5.5@2312.27,3179.93 v3(2312.27,3302.73) ; v3@2313.96,2584.42 U5.16@2313.96,2660.52 ; U5.4@2363.96,3178.24 2363.96,3251.04 v3(2312.27,3302.73)
  Top Layer w60: C20.1@1688.06,3299.38 1732.27,3255.17 1732.27,3252.73 v3(1772.27,3252.73) ; C2.1@1908.96,4493.48 1928.49,4473.95 C3.2@2058.96,4473.95 C3.2@2058.04,4473.03
  Top Layer w80: P9.1@1603.96,4435.01 1739.99,4435.01 1798.45,4493.48 C2.1@1908.96,4493.48
  Bottom Layer w60: 1440,3090.46 1522.27,3172.73 1692.27,3172.73 v3(1772.27,3252.73) 2027.27,3252.73 2122.27,3347.73 2267.27,3347.73 v3(2312.27,3302.73)
  Bottom Layer w80: 1437.27,3067.73 1437.27,3963.32 ; 1440,3090.46 1440,2595 1521.27,2513.73 2268.68,2513.73 2308.27,2553.32 v3@2308.27,2578.73 ; v7(2317.27,4007.73) 1887.27,4007.73 1739.99,4155.01 P10.1@1608.96,4155.01 1437.27,3963.32 ; P13.1@4435,4595 3912.73,4595 3800,4707.73 1602.73,4707.73 1435,4540 1435,3995.68 1437.27,3963.32
  other v3: 2312.27,2582.73
VBATT2: C32.1 P12.1 P13.2 U9.4 U9.5 U9.16 U11.4 U11.5 U11.16 | length 6191.7
  Top Layer w12: v3@4282.35,3297.73 v3(4282.35,3317.73)
  Top Layer w30: U9.4@4222.27,3417.22 4222.27,3367.81 4272.27,3317.81 U9.5@4272.27,3417.22 ; U11.4@4242.27,2677.22 4242.27,2622.81 v3(4267.35,2597.73) 4292.27,2622.65 U11.5@4292.27,2677.22 ; v3@4282.35,3297.73 4292.27,3287.81 U11.16@4292.27,3194.93
  Top Layer w40: U9.16@4272.27,3934.93 v3(4272.27,4017.65)
  Top Layer w60: v3(4832.27,3347.65) 4874.87,3347.65 C32.1@4926.48,3296.04
  Bottom Layer w60: v3(4282.35,3317.73) 4307.35,3342.73 v3@4827.35,3342.73 ; v3(4832.27,3347.65) v3@4827.35,3342.73 ; 5175,3500 5097.73,3422.73 4907.35,3422.73 v3@4827.35,3342.73
  Bottom Layer w75: 5150,4175.08 5171.5,4153.58 5171.5,3396.48 5160.77,3385.75 5160.77,2650.77
  Bottom Layer w80: v3(4267.35,2597.73) 4267.35,2593.78 4336.91,2524.23 5034.23,2524.23 5160.77,2650.77 ; v3(4272.27,4017.65) 4288.12,4033.5 4993.12,4033.5 5150,4190.38 5150,4405 4860,4695 4735,4695 4695.63,4655.63 P12.1@4695.63,4590 ; P13.2@4535,4595 P12.1@4690.63,4595
pads on no net: S1.1 S1.2 U1.1 U1.4 U1.14 U1.27 U1.28 U1.29 U1.41 U1.42 U1.43 U1.44 U1.45 U1.46 U1.47 U1.48 U1.49 U1.50 U1.51 U1.52 U1.53 U1.54 U1.55 U1.56 U1.57 U1.58 U1.59 U1.60 U1.63 U1.65 U1.66 U1.67 U1.68 U1.69 U1.79 U1.82 U1.83 U1.84 U1.88 U1.89 U1.90 U1.91 U1.92 U1.93 U1.94 U1.95 U1.96 U2.4 U2.5 U2.6 U2.7 U2.8 U2.9 U2.11 U2.12 U2.13 U2.14 U2.15 U2.16 U2.18 U2.19 U2.20 U4.7 X1.3 X1.4 X2.3 X2.4 X3.3 X3.4 X4.3 X4.4 X5.3 X5.4
copper on no net:
  other v8: 2685,4040 5085,4635

## Polygon pours and split planes (outlines as drawn)
GND on Bottom Layer "Bottom Layer-No Net" (solid, remove dead copper, pour order 4): 1382.27,2482.73 5212.27,2482.73 5212.27,4502.73 4957.27,4757.73 1617.27,4757.73 1617.27,4737.73 1387.27,4507.73

## Keep-outs
Keep-Out Layer:
  lines w10: 1355,2450 5250,2450 5250,4840 1355,4840 1355,2450

## Other copper
Top Layer:
  region net GND: 5037.27,3367.73 5037.27,3227.73 5197.27,3227.73 5197.27,3367.73
  region net GND: 1417.27,3367.73 1417.27,3227.73 1577.27,3227.73 1577.27,3367.73
  region net GND: 1827.27,4387.73 1827.27,4247.73 1987.27,4247.73 1987.27,4387.73
  region net GND: 2362.27,4397.73 2362.27,4257.73 2522.27,4257.73 2522.27,4397.73
Bottom Layer:
  region net GND: 4967.27,3367.73 4967.27,3227.73 5117.27,3227.73 5117.27,3367.73
  region net GND: 1500,3370 1500,3230 1640,3230 1640,3370

## Silkscreen, mask and mechanical layers (free items; w line width, h text height)
Top Overlay:
  circle w10: c5090,4630 r106.3
  circle w10: c2685,4040 r106.3
  lines w10: 2815,3415 2815,4460 2815,4465 3050,4700 3545,4700 3790,4455 3790,3415 2815,3415
  text "claney@cse.unl.edu" at 3680,4685 h50
  text "2014r2" at 3675,4605 h50
  text "+" at 2582.27,4562.73 h50
  text "-" at 2662.27,4562.73 h50
  text "nimbus.unl.edu" at 3675,4550 h50
  text "-" at 1577.27,4497.73 h50 r90
  text "+" at 1577.27,4417.73 h50 r90
  text "-" at 1582.27,4217.73 h50 r90
  text "+" at 1582.27,4137.73 h50 r90

## Text inside footprints (layer, text, board x,y; h text height)
P5: Top Overlay "1" at 4787.27,4497.73 h50 r270; Top Overlay "2" at 4892.27,4507.73 h50 r270; Top Overlay "5" at 4782.27,4137.73 h50 r270; Top Overlay "6" at 4882.27,4137.73 h50 r270